# Altium PCB POWER PCB.PcbDoc (part 2 of 2)
Units mil, origin at the board's own origin, x right, y up, seen from the top; angles counter-clockwise.
Board outline 3944.91 x 1977.9 mil, 2 copper layers (Top Layer, Bottom Layer); 41 components, 26 nets, 102 pads, 0 vias.
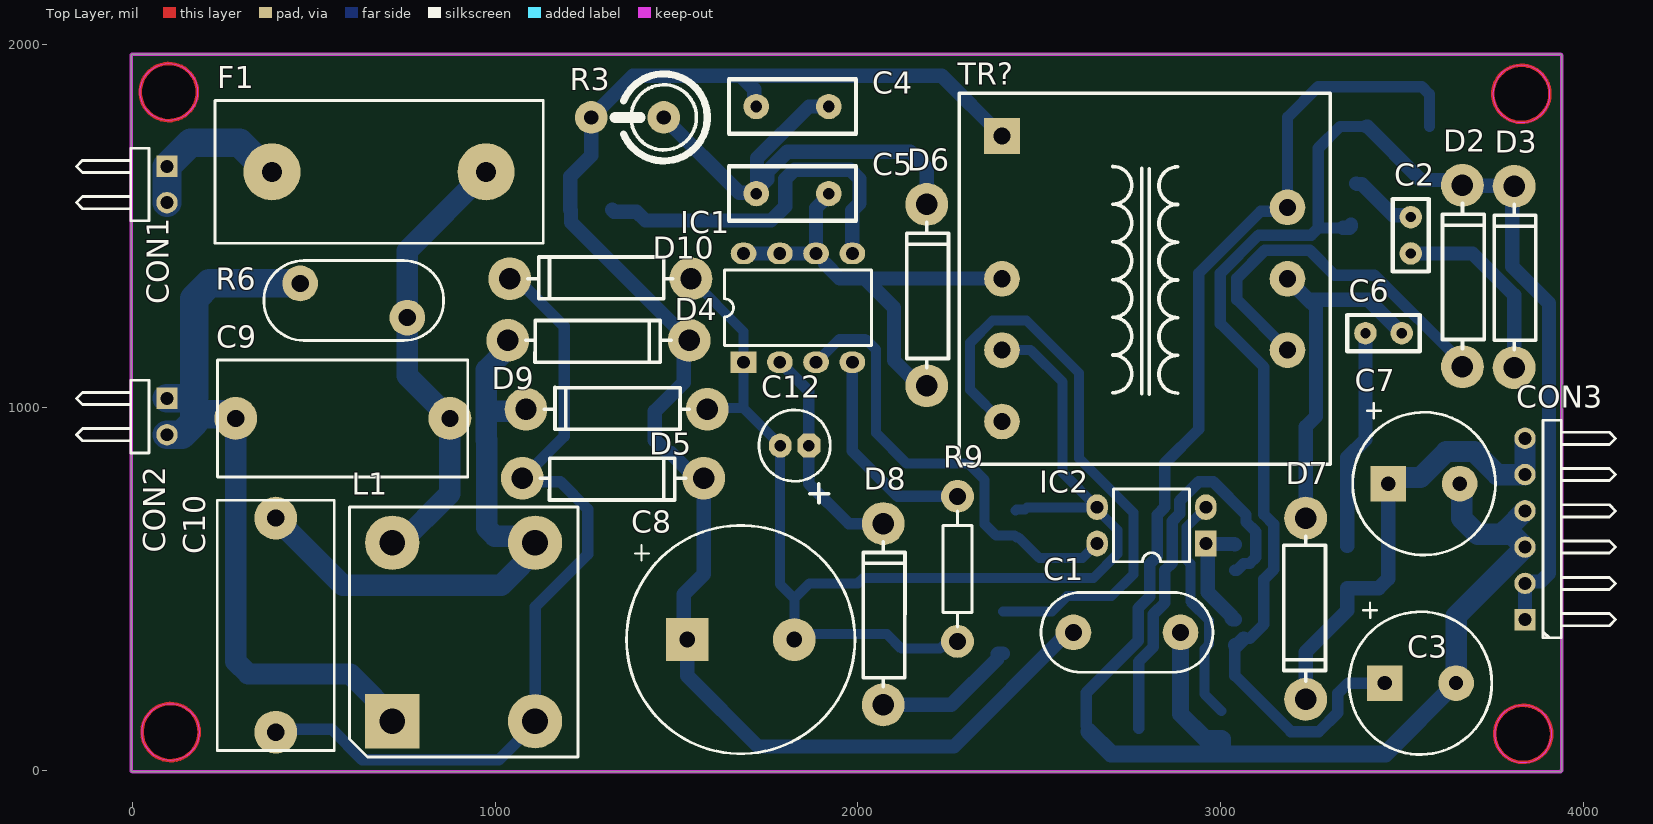
[diagram p0: Top Layer view]

## Part data (continued)
R1 R4 R5: library part "CRCW1206100RJNEA (2)", "Res Thick Film 1206 100 Ohm 5% 1/4W 200ppm/C Molded SMD SMD Paper T/R", Case Code (Metric)=3216, Case Code (Imperial)=1206, Manufacturer="Vishay Dale", Max Operating Temperature=155°C, Min Operating Temperature=-55°C, Package Quantity=5000, Power Rating=250mW, Supplier Part Number 1=541-100ECT-ND, Temperature Coefficient=200ppm/°C, Tolerance=5%, Voltage Rating=200V, Case/Package=1206, Category="Chip SMD Resistors", Component=10, ComponentLink1Description=https://datasheet.ciiva.com/16755/70201119-16755637.pdf?src-supplier=Allied+Electronics, ComponentLink1URL=https://datasheet.ciiva.com/16755/70201119-16755637.pdf?src-supplier=Allied+Electronics, ComponentLink2Description=https://datasheet.ciiva.com/5547/dcrcwe3-109170-5547382.pdf?src-supplier=Mouser, ComponentLink2URL=https://datasheet.ciiva.com/5547/dcrcwe3-109170-5547382.pdf?src-supplier=Mouser, ComponentLink3Description=https://datasheet.ciiva.com/8979/dcrcwe3-8979850.pdf?src-supplier=Avnet, ComponentLink3URL=https://datasheet.ciiva.com/8979/dcrcwe3-8979850.pdf?src-supplier=Avnet, ComponentLink4Description=https://datasheet.ciiva.com/28621/1847332-28621482.pdf?src-supplier=Element14, ComponentLink4URL=https://datasheet.ciiva.com/28621/1847332-28621482.pdf?src-supplier=Element14, ComponentLink5Description=https://datasheet.ciiva.com/8979/dcrcwe3-8979852.pdf?src-supplier=Avnet, ComponentLink5URL=https://datasheet.ciiva.com/8979/dcrcwe3-8979852.pdf?src-supplier=Avnet, ComponentLink6Description=https://datasheet.ciiva.com/16759/70201119-16759884.pdf?src-supplier=Allied+Electronics, ComponentLink6URL=https://datasheet.ciiva.com/16759/70201119-16759884.pdf?src-supplier=Allied+Electronics, ComponentLink7Description=https://datasheet.ciiva.com/17171/dcrcwe3-17171503.pdf?src-supplier=Avnet+Europe, ComponentLink7URL=https://datasheet.ciiva.com/17171/dcrcwe3-17171503.pdf?src-supplier=Avnet+Europe, Composition="Thick Film", Contact Plating=Tin, Depth=1.6mm, Height=0.55mm, Length=3.2mm, Manufacturer Part Number="CRCW1206100RJNEA (2)", Military Standard=Not, Mount="Surface Mount", Packaging="Tape and Reel", Pricing 1="1=0,10000, 10=0,07000, 100=0,02840, 1000=0,01275, 2500=0,01106 (USD)", Radiation Hardening=No, REACH SVHC=Unknown, Resistance=100R, RoHS=Yes, Stock 1=1332, Supplier 1=Digi-Key, Termination=SMD/SMT, Weight=0.000353oz, Width=1.6mm
R2: library part CRCW120656K0JNEA, "Resistor,Metal Glaze,56KOhms,200WV,5+/-% Tol,-200,200ppm-TC,1206-Case ;RoHS Compliant: Yes", Case Code (Metric)=3216, Case Code (Imperial)=1206, Manufacturer="Vishay Dale", Max Operating Temperature=155°C, Max Power Dissipation=250mW, Min Operating Temperature=-55°C, Package Quantity=5000, Resistance=56kR, Supplier Part Number 1=541-56KECT-ND, Temperature Coefficient=200ppm/°C, Tolerance=5%, Voltage Rating=200V, Case/Package=1206, Category="Chip SMD Resistors", Component=11, ComponentLink1Description=https://datasheet.ciiva.com/2496/dcrcwe3-2496448.pdf?src-supplier=Digi-Key, ComponentLink1URL=https://datasheet.ciiva.com/2496/dcrcwe3-2496448.pdf?src-supplier=Digi-Key, ComponentLink2Description=https://datasheet.ciiva.com/2496/dcrcwe3-2496449.pdf?src-supplier=Digi-Key, ComponentLink2URL=https://datasheet.ciiva.com/2496/dcrcwe3-2496449.pdf?src-supplier=Digi-Key, ComponentLink3Description=https://datasheet.ciiva.com/2496/dcrcwe3-2496450.pdf?src-supplier=Digi-Key, ComponentLink3URL=https://datasheet.ciiva.com/2496/dcrcwe3-2496450.pdf?src-supplier=Digi-Key, ComponentLink4Description=https://datasheet.ciiva.com/8999/dcrcwe3-8999045.pdf?src-supplier=Avnet, ComponentLink4URL=https://datasheet.ciiva.com/8999/dcrcwe3-8999045.pdf?src-supplier=Avnet, ComponentLink5Description=https://datasheet.ciiva.com/8999/dcrcwe3-8999051.pdf?src-supplier=Avnet, ComponentLink5URL=https://datasheet.ciiva.com/8999/dcrcwe3-8999051.pdf?src-supplier=Avnet, Composition="Thick Film", Contact Plating=Tin, Depth=1.6mm, Features="Automotive AEC-Q200", Height=0.55mm, Height - Seated (Max)=0.024inch, Lead Free="Lead Free", Length=3.2mm, Manufacturer Part Number=CRCW120656K0JNEA, Military Standard=Not, Number of Pins=2, Number of Terminations=2, Packaging="Tape and Reel", Power Rating=250mW, Pricing 1="1=0,10000, 10=0,07000, 100=0,02840, 1000=0,01275, 2500=0,01106 (USD)", Radiation Hardening=No, REACH SVHC=Unknown, RoHS=Yes, Stock 1=3044, Supplier 1=Digi-Key, Voltage Rating (DC)=200V, Weight=0.000353oz, Width=0.063inch, Working Voltage=200V
R3: library part ERJ-1TYJ104U, "RES SMD 100K OHM 5% 1W 2512", Case Code (Metric)=6432, Case Code (Imperial)=2512, Manufacturer=Panasonic, Max Operating Temperature=155°C, Max Power Dissipation=1W, Min Operating Temperature=-55°C, Package Quantity=1, Resistance=100kR, Supplier Part Number 1=PT100KXCT-ND, Temperature Coefficient=200ppm/°C, Tolerance=5%, Voltage Rating=200V, Voltage Rating (DC)=250V, Case/Package=2512, Category="Chip SMD Resistors", Component=12, ComponentLink1Description=https://datasheet.ciiva.com/34303/2010000-34303803.pdf?src-supplier=Jameco, ComponentLink1URL=https://datasheet.ciiva.com/34303/2010000-34303803.pdf?src-supplier=Jameco, ComponentLink2Description=https://datasheet.ciiva.com/43469/1678796-43469942.pdf?src-supplier=Farnell, ComponentLink2URL=https://datasheet.ciiva.com/43469/1678796-43469942.pdf?src-supplier=Farnell, ComponentLink3Description=https://datasheet.ciiva.com/7830/1678796-7830968.pdf?src-supplier=Element14, ComponentLink3URL=https://datasheet.ciiva.com/7830/1678796-7830968.pdf?src-supplier=Element14, ComponentLink4Description=https://datasheet.ciiva.com/46380/1678796-46380426.pdf?src-supplier=Element14, ComponentLink4URL=https://datasheet.ciiva.com/46380/1678796-46380426.pdf?src-supplier=Element14, ComponentLink5Description=https://datasheet.ciiva.com/30120/4aoa0000ce1-30120107.pdf?src-supplier=Onlinecomponents.com, ComponentLink5URL=https://datasheet.ciiva.com/30120/4aoa0000ce1-30120107.pdf?src-supplier=Onlinecomponents.com, ComponentLink6Description=https://datasheet.ciiva.com/17208/aoa0000ce1-17208142.pdf?src-supplier=Avnet+Europe, ComponentLink6URL=https://datasheet.ciiva.com/17208/aoa0000ce1-17208142.pdf?src-supplier=Avnet+Europe, Composition="Thick Film", Contact Plating=Tin, Depth=3.2mm, Height=0.028inch, Lead Free="Lead Free", Length=6.4mm, Manufacturer Part Number=ERJ-1TYJ104U, Military Standard=Not, Mount="Surface Mount", Number of Terminations=2, Packaging="Tape and Reel", Power Rating=1W, Pricing 1="1=0,39000, 10=0,30100, 100=0,12660, 1000=0,06987 (USD)", Radiation Hardening=No, REACH SVHC="No SVHC", RoHS=Yes, Stock 1=14258, Supplier 1=Digi-Key, Width=0.126inch
R6: library part B72220Q0321K101, "EPCOS         B72220Q0321K101             TVS Varistor, B722 Series, 320 V, 420 V, 840 V, Disc 20mm, Metal Oxide Varistor (MOV)", Capacitance=780pF, Case/Package=Metal, Clamping Current=130A, Clamping Voltage=840V, Manufacturer="TDK EPCOS", Max Operating Temperature=85°C, Max Surge Current=15kA, Max Voltage Rating (AC)=320V, Max Voltage Rating (DC)=420V, Min Operating Temperature=-40°C, Package Quantity=250, Supplier Part Number 1=495-6475-ND, Tolerance=10%, Varistor Voltage=510V, Category=Resistors, Component=13, ComponentLink1Description=https://datasheet.ciiva.com/1278/31623-1278144.pdf?src-supplier=Element14, ComponentLink1URL=https://datasheet.ciiva.com/1278/31623-1278144.pdf?src-supplier=Element14, ComponentLink2Description=https://datasheet.ciiva.com/15155/getdatasheetpartid-382578-15155932.pdf?src-supplier=Verical, ComponentLink2URL=https://datasheet.ciiva.com/15155/getdatasheetpartid-382578-15155932.pdf?src-supplier=Verical, Contact Plating=Tin, Depth=6.3mm, Diameter=20mm, Energy=255J, Lead Length=30mm, Lead Pitch=10mm, Lead/Base Style=Radial, Length=22.5mm, Manufacturer Part Number=B72220Q0321K101, Mount="Radial,Through Hole", Packaging=Bulk, Pricing 1="1=1,61000, 10=1,42400, 25=1,28640, 100=1,12550, 250=0,98772, 500=0,87286, 1000=0,68910, 2500=0,64316, 5000=0,61100 (USD)", REACH SVHC="No SVHC", RoHS=Yes, Stock 1=1450, Supplier 1=Digi-Key, Thickness=6.3mm, Voltage Rating (AC)=320V, Voltage Rating (DC)=420V, Voltage Tolerance=10%, Weight=0.17637oz
R7: library part CRCW0805680RJNEA, "Resistor;  Thick Film;  680 Ohms;  0.125 W;  5%;  SMT;  0805;  TCR 73 ppm/DegC;  Tape and Reel", Case Code (Metric)=2012, Case Code (Imperial)=0805, Manufacturer="Vishay Dale", Max Operating Temperature=155°C, Max Power Dissipation=125mW, Min Operating Temperature=-55°C, Package Quantity=1, Supplier Part Number 1=541-680ACT-ND, Temperature Coefficient=200ppm/°C, Tolerance=5%, Voltage Rating=150V, Case/Package=0805, Category="Chip SMD Resistors", Component=14, ComponentLink1Description=https://datasheet.ciiva.com/17159/dcrcwe3-17159253.pdf?src-supplier=Avnet+Europe, ComponentLink1URL=https://datasheet.ciiva.com/17159/dcrcwe3-17159253.pdf?src-supplier=Avnet+Europe, ComponentLink2Description=https://datasheet.ciiva.com/2464/dcrcwe3-2464294.pdf?src-supplier=Digi-Key, ComponentLink2URL=https://datasheet.ciiva.com/2464/dcrcwe3-2464294.pdf?src-supplier=Digi-Key, ComponentLink3Description=https://datasheet.ciiva.com/2464/dcrcwe3-2464295.pdf?src-supplier=Digi-Key, ComponentLink3URL=https://datasheet.ciiva.com/2464/dcrcwe3-2464295.pdf?src-supplier=Digi-Key, ComponentLink4Description=https://datasheet.ciiva.com/2464/dcrcwe3-2464296.pdf?src-supplier=Digi-Key, ComponentLink4URL=https://datasheet.ciiva.com/2464/dcrcwe3-2464296.pdf?src-supplier=Digi-Key, ComponentLink5Description=https://datasheet.ciiva.com/8923/dcrcwe3-8923242.pdf?src-supplier=Avnet, ComponentLink5URL=https://datasheet.ciiva.com/8923/dcrcwe3-8923242.pdf?src-supplier=Avnet, ComponentLink6Description=https://datasheet.ciiva.com/8923/dcrcwe3-8923245.pdf?src-supplier=Avnet, ComponentLink6URL=https://datasheet.ciiva.com/8923/dcrcwe3-8923245.pdf?src-supplier=Avnet, ComponentLink7Description=https://datasheet.ciiva.com/16781/70201119-16781375.pdf?src-supplier=Allied+Electronics, ComponentLink7URL=https://datasheet.ciiva.com/16781/70201119-16781375.pdf?src-supplier=Allied+Electronics, Composition="Thick Film", Contact Plating=Tin, Depth=1.25mm, Features="Automotive AEC-Q200", Height=0.45mm, Lead Free="Lead Free", Length=2mm, Manufacturer Part Number=CRCW0805680RJNEA, Military Standard=Not, Number of Pins=2, Number of Terminations=2, Packaging="Tape and Reel", Power Rating=125mW, Pricing 1="1=0,10000, 10=0,03800, 100=0,01560, 1000=0,00702, 2500=0,00610 (USD)", Radiation Hardening=No, REACH SVHC=Unknown, Resistance=680R, RoHS=Yes, Stock 1=19628, Supplier 1=Digi-Key, Termination=SMD/SMT, Voltage Rating (DC)=150V, Weight=0.000194oz, Width=1.25mm
R8: library part CRCW08051K00FKEA, "Res Thick Film 0805 1K Ohm 1% 0.125W(1/8W) ±100ppm/C Pad SMD Automotive T/R", Case Code (Metric)=2012, Case Code (Imperial)=0805, Manufacturer="Vishay Dale", Max Operating Temperature=155°C, Min Operating Temperature=-55°C, Package Quantity=5000, Power Rating=125mW, Resistance=1kR, Supplier Part Number 1=541-1.00KCCT-ND, Temperature Coefficient=100ppm/°C, Tolerance=1%, Voltage Rating=150V, Case/Package=0805, Category="Chip SMD Resistors", Component=15, ComponentLink1Description=https://datasheet.ciiva.com/11808/0900766b80d98b26-11808530.pdf?src-supplier=RSComponents, ComponentLink1URL=https://datasheet.ciiva.com/11808/0900766b80d98b26-11808530.pdf?src-supplier=RSComponents, ComponentLink2Description=https://datasheet.ciiva.com/46381/1697337-46381606.pdf?src-supplier=Element14, ComponentLink2URL=https://datasheet.ciiva.com/46381/1697337-46381606.pdf?src-supplier=Element14, ComponentLink3Description=https://datasheet.ciiva.com/3258/dcrcwe3-3258215.pdf?src-supplier=Avnet, ComponentLink3URL=https://datasheet.ciiva.com/3258/dcrcwe3-3258215.pdf?src-supplier=Avnet, ComponentLink4Description=https://datasheet.ciiva.com/26312/fld-crcw-e3-data-en-26312922.pdf?src-supplier=Distrelec, ComponentLink4URL=https://datasheet.ciiva.com/26312/fld-crcw-e3-data-en-26312922.pdf?src-supplier=Distrelec, ComponentLink5Description=https://datasheet.ciiva.com/46441/1720486-46441626.pdf?src-supplier=Element14, ComponentLink5URL=https://datasheet.ciiva.com/46441/1720486-46441626.pdf?src-supplier=Element14, ComponentLink6Description=https://datasheet.ciiva.com/16213/dcrcwe3-16213643.pdf?src-supplier=Future+Electronics, ComponentLink6URL=https://datasheet.ciiva.com/16213/dcrcwe3-16213643.pdf?src-supplier=Future+Electronics, ComponentLink7Description=https://datasheet.ciiva.com/17204/dcrcwe3-17204396.pdf?src-supplier=Avnet+Europe, ComponentLink7URL=https://datasheet.ciiva.com/17204/dcrcwe3-17204396.pdf?src-supplier=Avnet+Europe, Composition="Thick Film", Contact Plating=Tin, Depth=1.25mm, Height=0.45mm, Lead Free="Lead Free", Length=2mm, Manufacturer Part Number=CRCW08051K00FKEA, Military Standard=Not, Number of Pins=2, Packaging="Tape and Reel", Pricing 1="1=0,10000, 10=0,06000, 100=0,02450, 1000=0,01102, 2500=0,00957 (USD)", Radiation Hardening=No, REACH SVHC=Unknown, RoHS=Yes, Stock 1=304825, Supplier 1=Digi-Key, Termination=SMD/SMT, Voltage Rating (DC)=150V, Weight=0.000194oz, Width=1.25mm
R9: library part PTF566K8000QYEK, "Res Metal Film 6.8K Ohm 0.02% 0.125W(1/8W) ±10ppm/C Conformal Coated AXL Bulk", Case/Package=Conformal, Manufacturer="Vishay Semiconductors", Max Operating Temperature=150°C, Min Operating Temperature=-55°C, Resistance=6.8kR, Temperature Coefficient=10ppm/°C, Tolerance=0.02%, Category="Through-Hole Resistors", Component=18, ComponentLink1Description=https://datasheet.ciiva.com/17039/ptf-17039642.pdf?src-supplier=Avnet+Europe, ComponentLink1URL=https://datasheet.ciiva.com/17039/ptf-17039642.pdf?src-supplier=Avnet+Europe, Composition="Metal Film", Contact Plating=Tin,Matte, Diameter=2.31mm, Length=7.62mm, Manufacturer Part Number=PTF566K8000QYEK, Military Standard=Not, Mount="Through Hole", Packaging=Bulk, Pricing 1="100=2,92576, 200=2,85420, 400=2,81400, 600=2,73360, 800=2,67330 (USD)", Radiation Hardening=No, RoHS=Yes, Supplier 1=Avnet, Supplier Part Number 1=PTF566K8000QYEK, Termination=Axial
TR?: library part 125J, "Audio Transformers / Signal Transformers Audio, Tube Output 2.5 or 4K Ohm, 8W", Manufacturer="Hammond Manufacturing", Package Quantity=1, Power Rating=8W, Supplier Part Number 1=HM2525-ND, Category=Transformers, Component=8, Manufacturer Part Number=125J, Mount="Chassis Mount", Pricing 1="1=41,92000, 10=36,99000, 25=35,75720, 50=32,05800, 100=30,82500 (USD)", RoHS=Yes, Stock 1=3, Supplier 1=Digi-Key, Termination="Wire Leads"

## Nets (pads, with @x,y where several pads share a name; then routed paths per layer and width w, separated by ;. In a path a pad name is that pad's centre, name@x,y a point inside that pad or via, vN(x,y) a via of type N, cw(c..) or ccw(c..) an arc to the next point about the centre after c; other vN are vias at no path point)
+6V: C7.1 CON3.5 CON3.6 D7.2 R4.2 | length 1280.4
  Bottom Layer w39.37: D7.2 3235,325 3350,440 R4.2 3436.93,501.93 3463.15,528.15 C7.1 C7.1@3476.5,803.35
  Bottom Layer w59.06: C7.1@3476.5,803.35 3480.27,807.12 3551.62,807.12 3623.24,878.74 3699.75,878.74 3763.49,815 CON3.5 CON3.6
+24V: C3.1 CON3.1 CON3.2 D1.2 D2.2 D3.2 R1.2 R7.2 | length 4351.7
  Bottom Layer w31.5: R7.2 3040,260.64 3194.38,106.26 3271.76,106.26 3323.74,158.24 3323.74,211.67 3352.07,240 C3.1 ; R7.2@3064.45,363.11 3080.84,363.11 3120,402.27 3120,526.27 3147.33,553.6 3147.33,677.61 3120,704.94 3120,1111.57 3000,1231.57 3000,1370 3105.39,1475.39 3250.39,1475.39 3270,1495 ; 3337.85,1495 3270,1495 ; D1.2 3330,1775 3270,1715 3270,1495
  Bottom Layer w39.37: R7.2 3045.91,344.57 R7.2@3064.45,363.11 ; 3337.85,1495 3338.87,1496.02 3356.3,1496.02 3360.24,1499.96 R1.2@3360.24,1503.9 ; D1.2 3405.35,1775 3552.79,1627.57 3652.43,1627.57 D2.2 3668.75,1611.25 3808.75,1611.25 D3.2 3805,1605 3805,1388.72 3906.27,1287.44 3906.27,543.06 3883.21,520 3850.33,520 3845.33,515 CON3.2 CON3.1
GND: C1.2 C3.2 C7.2 CON3.3 CON3.4 D1.1 D11.1 D12.1 TR?.9 | length 4866.6
  Bottom Layer w31.5: D12.1@2637.2,106.54 D12.1 2630,122.2 2630,213.13 2773.54,356.67 2773.54,446.95 2805.43,478.84 2805.43,569.12 2825.67,589.35 2825.67,703.84 2846.5,724.67 2846.5,846.5 2940.63,940.63 2940.63,1370.63 3111.73,1541.73 3174.88,1541.73 TR?.9 3185,1800 3270,1885 3555,1885 3576.61,1863.39 D1.1 ; D11.1 D11.1@3005,85.35 ; C7.2 C7.2@3665,785 ; 3775,650 3787.34,662.34
  Bottom Layer w47.24: D12.1@2637.2,106.54 2698.74,45 3005,45 ; C1.2 2890,155 2957.4,87.6 D11.1 ; D11.1@3005,85.35 3005,45 ; C3.2 3455,45 3005,45
  Bottom Layer w59.06: C3.2 3650,425 CON3.3 3805,650 3775,650 3710,650 3665,695 C7.2@3665,785 ; 3787.34,662.34 CON3.4
GND_M: C8.2 C11.1 C12.2 D9.1 D10.1 IC1.1 IC2.3 R9.1 TR?.4 | length 3586.6
  Bottom Layer w27.56: D10.1 1685,1210 IC1.1 1685,998.23 ; D9.1 1588.23,998.23 1685,998.23 ; C8.2 1840.07,375.07 2079.93,375.07 2120,335 2226.35,335 2236.55,345.21 2265.21,345.21 R9.1 ; C8.2@1825,381.31 1825,473.48 ; TR?.4 2476.85,1158.15 2565,1070 2565,820 IC2.3 IC2.3@2660,724.42 ; C11.1 2437.95,718.39 2460.89,718.39 2466.92,724.42 IC2.3@2660,724.42 ; 1685,998.23 1786.26,896.97 C12.2 1785,893.74 1785,513.48 1825,473.48 ; 1825,473.48 1866.68,515.16 2000.16,515.16 2015,530 2650,530 2716.54,596.54 2716.54,662.56 2660,719.09 IC2.3@2660,724.42
LINE: C9.2 F1.2 L1.4 R6.2 | length 1224.5
  Bottom Layer w59.06: L1.4@735,622.13 875,762.13 C9.2 757.64,1087.36 R6.2 757.64,1432.64 F1.2
NetC1_1: C1.1 C4.2 C8.1 D4.2 D5.2 R2.2 R3.2 TR?.1 | length 4467.6
  Bottom Layer w39.37: C4.2 1714.14,1835.86 1714.14,1877.8 1676.94,1915 ; TR?.1 2231.3,1915 1676.94,1915 ; C1.1 2580,380 2265,65 1725,65 1529.72,260.28 C8.1 1520,369.72 1520,485 1575,540 D5.2 1553.69,805 1482.95,875.74 1474.26,875.74 1440,910 1440,989.35 1519.93,1069.28 1519.93,1169.93 D4.2 1208.9,1511.1 1208.9,1543.03 R2.2 1206.93,1636.93 1265,1695 R3.2 1380,1915 1676.94,1915
NetC2_1: C2.1 D3.1 | length 532.6
  Bottom Layer w39.37: C2.1 3695,1425 3810,1310 D3.1
NetC2_2: C2.2 R1.1 | length 188.6
  Bottom Layer w39.37: R1.1 3376.97,1616.1 3389.76,1616.1 3475.87,1530 3513.88,1530 3518.88,1525 C2.2
NetC4_1: C4.1 C5.2 D6.2 R3.1 | length 1339.8
  Bottom Layer w39.37: R3.1 1672.91,1592.09 1717.91,1592.09 C5.2 1720,1598.29 C5.2@1722.09,1600.38 ; C4.1 1919.64,1830.36 1865.36,1830.36 1722.09,1687.09 C5.2@1722.09,1600.38 ; D6.2 2190,1660 2145,1705 1805.18,1705 1750.63,1650.45 1750.63,1628.92 C5.2@1722.09,1600.38
NetC5_1: C5.1 D6.1 IC1.6 IC1.7 IC1.8 TR?.3 | length 1268.6
  Bottom Layer w39.37: IC1.8 IC1.7 IC1.6 1885,1550 1920,1585 C5.1 ; 1910.04,1396.4 1950.49,1355.94 2019.51,1355.94 ; D6.1@2190,1063.47 D6.1 2170,1060 2100,1130 2100,1275.45 2019.51,1355.94 ; TR?.3@2395,1355 TR?.3 2396.65,1355.94 2019.51,1355.94
NetC6_1: C6.1 D7.1 TR?.8 | length 1000.5
  Bottom Layer w39.37: TR?.8 3242.5,1297.5 ; D7.1 3235,946.62 3263.9,975.52 3263.9,1276.1 3242.5,1297.5 ; C6.1 3407.5,1297.5 3242.5,1297.5
NetC6_2: C6.2 R4.1 | length 611.2
  Bottom Layer w39.37: R4.1 3350,862.08 3400,912.08 C6.2 C6.2@3402.5,1202.5
NetC10_1: C10.1 D5.1 D10.2 L1.2 | length 2332.9
  Bottom Layer w31.5: C10.1 403.67,113.12 549.38,113.12 633.73,28.76 1010.65,28.76 1110,128.11 L1.2 1110,450 1255,595 1255,720 1180,795 1085,795 D5.1 1190,920 1190,1224.24 1059.24,1355 D10.2
NetC10_2: C10.2 D4.1 D9.2 L1.3 | length 1706.1
  Bottom Layer w59.06: C10.2 580,510 1016.57,510 L1.3@1128.7,622.13 ; D4.1@1035,1206.31 D4.1 1035,1163.69 975,1103.69 975,990 ; D9.2@1099.42,980.58 D9.2 1080,990 975,990 ; L1.3 1092.13,645 999.32,645 976.26,668.06 976.26,911.26 975,910 975,990
NetC11_2: C11.2 IC1.3 IC2.4 | length 1275.1
  Bottom Layer w27.56: IC1.3 1885.58,1125 1950,1189.42 2020.58,1189.42 2050.63,1159.37 2050.63,929.37 2135,845 2305,845 2349.96,800.04 2349.96,678.06 2380.5,647.52 2432.05,647.52 2437.95,641.61 2443.86,641.61 2500.47,585 2620,585 2650.33,615.33 2650.91,615.33 2660,624.42 IC2.4
NetC12_1: C12.1 D8.2 IC1.2 | length 619
  Bottom Layer w31.5: IC1.2 1785.58,1125 1865,1045.58 C12.1 1865,790 1975,680 D8.2
NetCON1_1: CON1.1 CON1.2 F1.1 | length 449.5
  Bottom Layer w78.74: CON1.2 CON1.1 160,1730 295,1730 375,1650 F1.1
NetD2_1: D2.1 TR?.7 | length 1050.2
  Bottom Layer w31.5: TR?.7 3045.43,1297.72 3045.43,1356.75 3122.58,1433.9 3246.1,1433.9 3315,1365 3425,1365 3667.5,1122.5 D2.1 ; D2.1@3692.5,1092.5 D2.1@3692.5,1093.32
NetD8_1: D8.1 R5.1 | length 396.3
  Bottom Layer w39.37: D8.1 2258.07,180 2385.24,307.17 2385.24,319.96 2387.2,321.93 R5.1
NetD11_2: D11.2 IC2.2 | length 635.3
  Bottom Layer w27.56: IC2.2 2960,723.59 2906.69,670.28 2906.69,579.72 2917.11,569.3 2917.11,464.47 2968.9,412.68 2968.9,347.32 2955.84,334.26 2955.84,209.32 D11.2
NetD12_2: D12.2 R8.1 | length 1117.8
  Bottom Layer w31.5: D12.2 2775,299.45 2815.04,339.49 2815.04,429.76 2846.93,461.65 2846.93,551.93 2867.17,572.17 2867.17,686.66 2887.99,707.48 2887.99,742.64 2940.36,795 2980,795 3070.63,704.37 3070.63,684.49 3097.96,657.16 3097.96,587.29 3080.57,569.9 3064.18,569.9 3045.64,551.36 R8.1
NetR2_1: IC1.5 R2.1 | length 1020.5
  Bottom Layer w39.37: R2.1 1327.99,1540.08 1389.92,1540.08 1414.53,1515.47 1760.88,1515.47 1800,1554.59 1800,1630 1825.63,1655.63 1979.78,1655.63 2005,1630.41 2005,1563.11 1985,1543.11 IC1.5
NetR5_2: R5.2 TR?.5 | length 1658.6
  Bottom Layer w27.56: TR?.5 2310,1048.9 2310,1178.86 2371.14,1240 2465,1240 2610,1095 2610,860 2760,710 2760,540 2700,480 2577.36,480 2535.43,438.07 R5.2
NetR7_1: IC2.1 R7.1 R8.2 | length 325.1
  Bottom Layer w39.37: IC2.1 IC2.1@2961.39,623.61 ; R8.2 3038.34,623.61 IC2.1@2961.39,623.61 ; R7.1 3034.09,415.43 3031.14,418.39 3031.14,424.29 2965,490.43 2965,620 IC2.1@2961.39,623.61
NetR9_2: IC1.4 R9.2 | length 586.8
  Bottom Layer w31.5: IC1.4 1985,880 2096.26,768.74 2110,755 R9.2
NEUTRAL: C9.1 CON2.1 CON2.2 L1.1 R6.1 | length 2126.7
  Bottom Layer w59.06: 165,1025 170,1030 170,981.3 170,959.59 ; C9.1@273.15,981.3 C9.1 285,969.45 285,299.59 319.59,265 600,265 L1.1@735,130
  Bottom Layer w78.74: CON2.2 135.41,925 170,959.59 ; CON2.1 165,1025 ; 170,981.3 C9.1@273.15,981.3 ; 170,1030 170,1300 212.24,1342.24 R6.1
pads on no net: D11.3
copper on no net: | length 1979
  Top Layer w10: 178.74,1870 ccw(c100,1870) 178.74,1870 ; 183.74,105 ccw(c105,105) 183.74,105 ; 3908.74,1865 ccw(c3830,1865) 3908.74,1865 ; 3913.74,100 ccw(c3835,100) 3913.74,100

## Polygon pours and split planes (outlines as drawn)
NetCON1_1 on Bottom Layer "NETCON1_1_L02_P005" (solid, remove dead copper, pour order 5): 12.5,1495 12.73,1495 32.7,1475 460,1475 477.33,1492.33 477.5,1492.53 477.5,1759.47 457.21,1780 440,1780 32.5,1780 12.5,1760
NEUTRAL on Bottom Layer "NEUTRAL_L02_P007" (solid, remove dead copper, pour order 7): 35,800 15,820 15,1380 39.79,1405 535.02,1405 565,1374.99 565,1180 540,1155 230,1155 225,1150 225,821.2 203.8,800
no net on Bottom Layer "NONET_L02_P006" (solid, remove dead copper, pour order 6): 305,1275
no net on Bottom Layer "NONET_L02_P004" (solid, remove dead copper, pour order 4): 15,1770
no net on Bottom Layer "NONET_L02_P002" (solid, remove dead copper, pour order 2): 195,1750
no net on Bottom Layer "NONET_L02_P001" (solid, remove dead copper, pour order 1): 195,1750

## Keep-outs
Keep-Out Layer:
  lines w10: 3940.89,1969.25 cw(c3937.01,1968.5) 3940.96,1968.5 3940.96,0 cw(c3937.01,0) 3937.01,-3.95 0,-3.95 cw(c0,0) -3.88,0.75 cw(c0,1.5) -3.95,1.5 -3.95,1970 cw(c0,1970) 0,1973.95 3937.01,1973.95 cw(c3937.01,1970) 3940.96,1970 cw(c3937.01,1970) 3940.89,1969.25 ; 3940.89,1969.25 3940.89,1969.25

## Silkscreen, mask and mechanical layers (free items; w line width, h text height)
Mechanical 1:
  lines w10: 3937.01,1968.5 3937.01,0 0,0 0,1970 3937.01,1970